# Allegro board HotwaterMachine_V1_0_10312009.brd
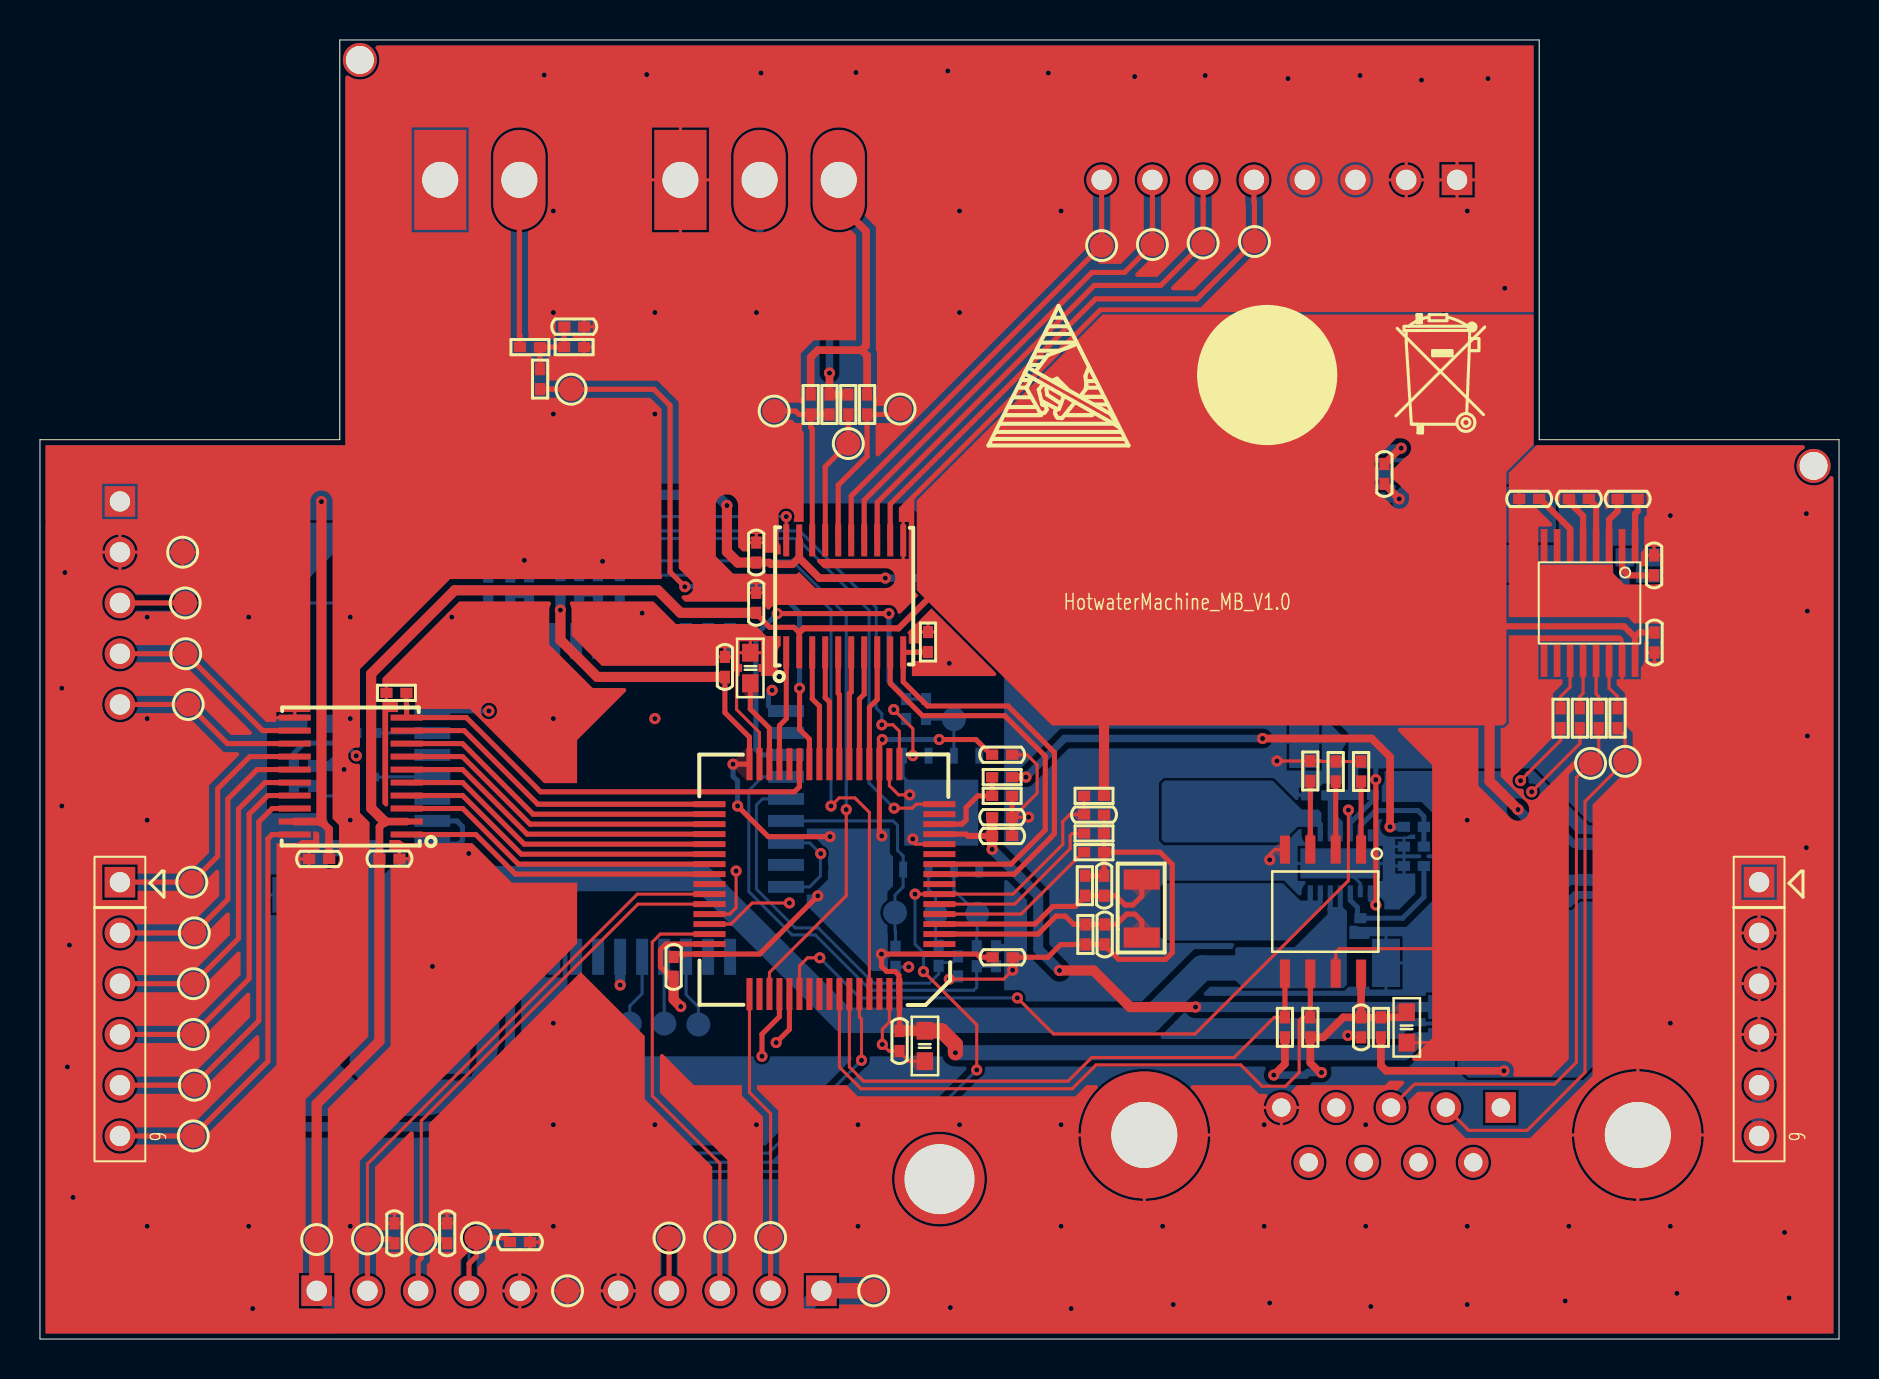
[diagram p0: board, top side]
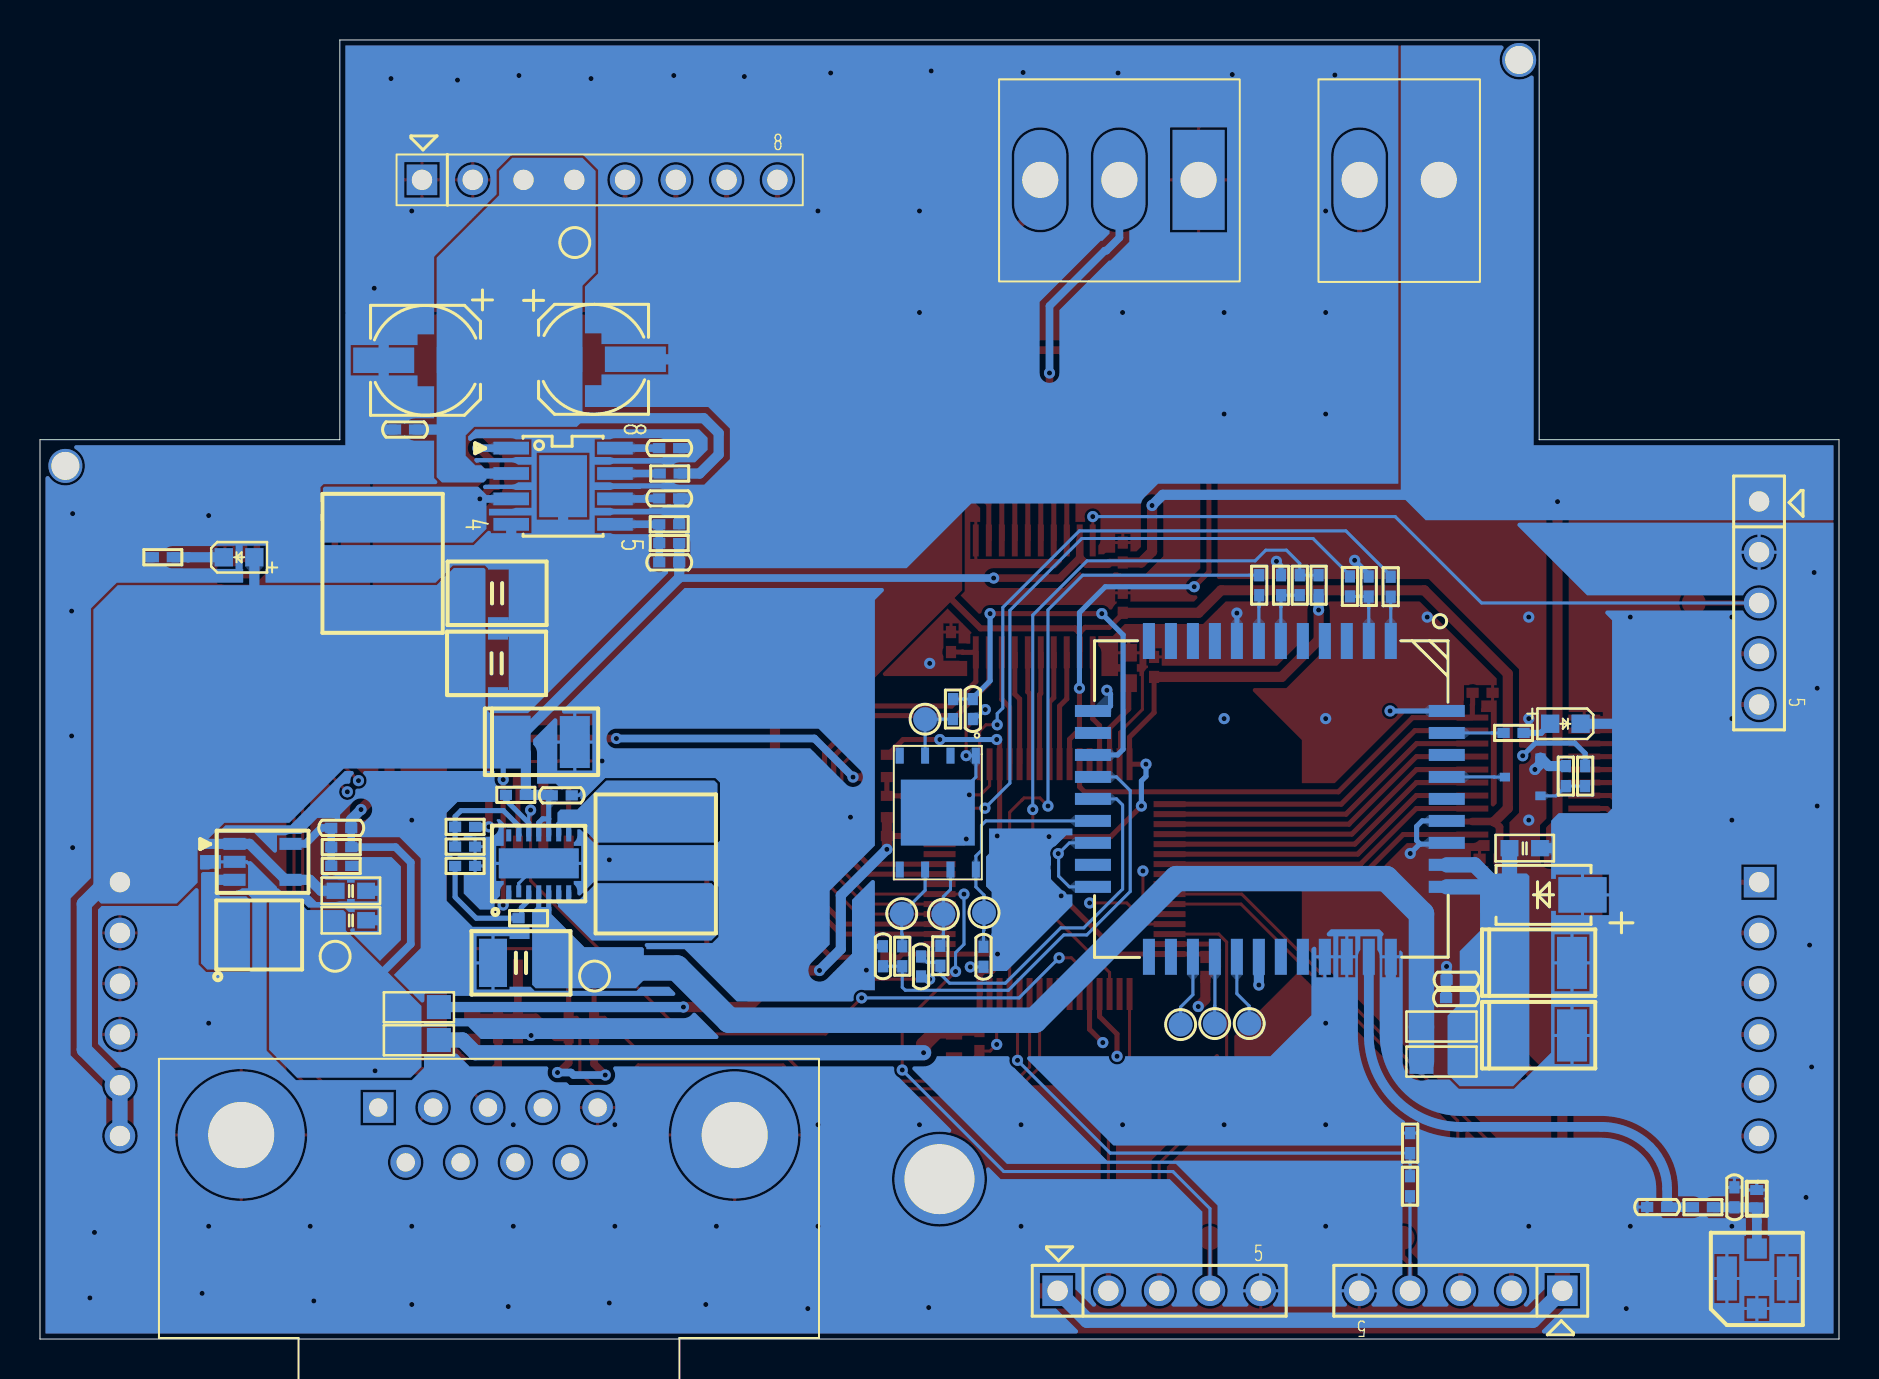
[diagram p1: board, bottom side, seen from below]

Outline 90 x 65 mm; copper layers: TOP, LAYER02, LAYER03, BOTTOM. Coordinates in mm from the lower left corner of the outline.
Outline path: 0,45 0,0 90,0 90,45 75,45 75,65 15,65 15,45 0,45

## Design rules (mm)
constraint set DEFAULT: min track width 0.152

## Placement (name value [footprint] x y rotation side)
C1  10uF/10V  [C0603]  15.72 24.56 180 bottom
C2  33pF/50V  [C0402]  19.16 17.06 0 bottom
C3  7pF/50V  [C0402]  19.13 17.98 0 bottom
C4  6TPE150MAZB NC  [TANB3528]  14.86 18.82 180 bottom
C5  6TPE150MAZB  [TANB3528]  14.86 15.19 180 bottom
C6  NC  [C0402]  9.1 6.6 0 bottom
C7  NC  [C0402]  5.23 7.09 90 bottom
C8  22pF/50V  [C0402]  45.92 18.64 270 bottom
C9  22pF/50V  [C0402]  47.83 19.15 90 bottom
C10  22pF/50V  [C0402]  43.33 31.52 270 bottom
C11  0.1uF/16V  [C0402]  42.8 19.13 270 bottom
C40  6TPE150MAZB  [TANB3528]  64.74 29.87 180 bottom
C41  10uF/10V  [C0603]  74.45 22.43 180 bottom
C42  0.1uF/16V  [C0402]  63.9 27.2 180 bottom
C43  0.1uF/16V NC  [C0402]  74.93 25.58 0 bottom
C44  10uF/10V  [C0603]  74.45 20.95 180 bottom
C45  100uF/6.3V  [C1210]  65.94 18.82 0 bottom
C46  0.1uF/50V  [C0402]  71.74 45.51 0 bottom
C47  10uF/35V  [C0505]  70.71 48.97 0 bottom
C48  10uF/35V  [C0505]  62.31 49.02 180 bottom
C49  0.1uF/16V  [C0402]  67.26 43.28 90 top
C50  0.1uF/16V  [C0402]  58.52 44.58 180 bottom
C51  22uF/10V  [C1210]  67.13 37.31 0 bottom
C52  22uF/10V  [C1210]  67.16 33.81 0 bottom
C53  0.47uF/16V  [C0402]  58.52 42.06 0 bottom
C54  22pF/16V NC  [C0402]  58.52 38.86 180 bottom
C60  0.1uF/16V  [C0402]  52.73 26.24 0 top
C61  4.7uF/10V  [C0603]  35.53 33.58 90 top
C62  7pF/50V  [C0402]  53.26 20.24 270 top
C63  7pF/50V  [C0402]  53.24 22.68 90 top
C64  0.1uF/16V  [C0402]  48.16 19.1 0 top
C65  0.1uF/16V  [C0402]  34.26 33.63 90 top
C66  0.1uF/16V  [C0402]  48.13 29.24 0 top
C67  0.1uF/16V  [C0402]  43 14.91 270 top
C68  0.1uF/16V  [C0402]  31.7 18.62 270 top
C69  4.7uF/10V  [C0603]  44.27 14.66 270 top
C70  0.1uF/16V  [C0402]  48.13 25.17 0 top
C71  1uF/16V  [C0402]  48.13 26.11 0 top
C72  22pF/50V  [C0402]  24.01 4.85 0 top
C73  22pF/50V  [C0402]  20.37 5.29 90 top
C74  22pF/50V  [C0402]  17.73 5.29 90 top
C75  10uF/10V  [C0603]  68.38 15.6 270 top
C76  0.1uF/16V  [C0402]  66.09 15.6 270 top
C77  0.1uF/16V  [C0402]  35.83 36.84 90 top
C78  0.1uF/16V  [C0402]  35.83 39.35 90 top
C79  0.1uF/16V  [C0402]  17.48 24.04 0 top
C80  0.1uF/16V  [C0402]  13.96 24.02 180 top
C81  0.1uF/16V  [C0402]  26.73 50.66 0 top
C82  0.1uF/16V  [C0402]  80.77 34.85 270 top
C83  0.1uF/16V  [C0402]  79.43 42.04 0 top
C84  0.1uF/16V  [C0402]  80.75 38.71 270 top
C85  0.1uF/16V  [C0402]  76.99 42.04 0 top
C86  0.1uF/16V  [C0402]  74.5 42.04 0 top
D1  -  [SMA4733A]  14.78 22.23 0 bottom
D2  CESD882UC5VB  [SOD882NP]  4.11 7.02 270 bottom
D3  GREEN  [LED0603]  13.69 30.78 180 bottom
D5  GREEN  [LED0603]  80.04 39.12 0 bottom
J1  MCJPS401  [IPEX]  4.11 3.03 0 bottom
J2  HEADER3  [JTAG_4-3]  36 58 0 bottom
J3  HEADER8  [JTAG-8]  62 58 180 bottom
J4  HEADER2  [JTAG_4-2]  22 58 0 bottom
J5  -  [JTAG-5]  4 35.56 270 bottom
J6  -  [JTAG-6]  86 16.51 270 top
J7  -  [JTAG-6]  4 16.51 270 top
L3  SWPA6028S4R7MT  [LSQR60]  59.18 23.77 180 bottom
L4  SWPA3010S1R5MT  [LSQR30]  79.02 20.22 90 bottom
L5  SWPA6028S4R7MT  [LSQR60]  72.87 38.81 0 bottom
NOREF  -  []  61.9 48.46 0 top
NOREF#2  -  [unnamed#2]  45 8 0 top
NOREF#3  -  [unnamed#3]  16 64 0 top
NOREF#4  -  []  72.59 48.41 0 top
NOREF#5  -  [unnamed#3]  88.73 43.69 0 top
NOREF#6  -  []  50.27 47.7 0 top
Q1  LMBT3904LT1G  [SOT23]  15.82 28.12 0 bottom
R1  000  [R0805]  19.89 15.62 180 bottom
R2  000  [R0805]  19.89 13.87 180 bottom
R3  000  [R0402]  6.81 6.6 180 bottom
R4  10K  [R0402]  13.67 28.17 90 bottom
R5  102  [R0402]  12.7 28.17 270 bottom
R6  102  [R0402]  16.28 30.33 0 bottom
R7  102 NC  [R0402]  26.04 37.72 270 bottom
R8  102  [R0402]  26.97 37.72 270 bottom
R9  562  [R0402]  27.91 37.72 270 bottom
R10  000  [R0402]  29.01 37.72 270 bottom
R11  000  [R0402]  22.43 37.64 270 bottom
R12  102  [R0402]  24.47 37.66 270 bottom
R13  562  [R0402]  23.53 37.65 270 bottom
R14  510  [R0402]  44.32 31.52 90 bottom
R15  510  [R0402]  46.86 19.15 270 bottom
R16  510  [R0402]  44.96 19.18 270 bottom
R41  105  [R0402]  66.19 27.23 0 bottom
R42  9102  [R0402]  74.93 24.61 180 bottom
R43  1504  [R0402]  65.56 21.06 180 bottom
R44  2002  [R0402]  74.93 23.67 0 bottom
R45  105 NC  [R0402]  68.73 25.63 180 bottom
R46  105  [R0402]  68.73 24.64 0 bottom
R47  2k  [R0402]  83.85 39.12 180 bottom
R48  2103  [R0402]  68.73 23.67 0 bottom
R53  10K  [R0402]  58.5 43.31 0 bottom
R54  124K  [R0402]  58.52 39.83 0 bottom
R55  22.1K  [R0402]  58.52 40.77 0 bottom
R67  4.7k/NC  [R0402]  52.73 27.18 0 top
R68  1504  [R0402]  48.13 28.12 0 top
R69  000  [R0805]  71.04 14.96 0 bottom
R70  105  [R0402]  52.73 24.36 180 top
R71  105 NC  [R0402]  52.3 20.24 90 top
R72  105 NC  [R0402]  52.27 22.68 270 top
R73  1504  [R0402]  48.13 27.18 180 top
R74  000  [R0805]  71.04 16.61 0 bottom
R75  105  [R0402]  52.73 25.3 180 top
R76  105  [R0402]  21.46 9.8 90 bottom
R77  105  [R0402]  21.46 7.65 90 bottom
R89  000  [R0402]  67.08 15.6 90 top
R111  472  [R0402]  62.28 15.6 270 top
R112  472  [R0402]  63.55 15.6 270 top
R113  105  [R0402]  66.09 28.4 270 top
R114  105  [R0402]  64.82 28.4 270 top
R115  105  [R0402]  63.55 28.42 270 top
R116  10K  [R0402]  44.42 34.87 270 top
R117  10K  [R0402]  17.83 32.33 0 top
R118  220K  [R0402]  39.5 46.76 270 top
R119  470K  [R0402]  38.56 46.76 270 top
R120  2.2K  [R0402]  40.44 46.76 90 top
R121  2.2K  [R0402]  41.38 46.76 90 top
R122  3.3K 1%  [R0402]  24.51 49.63 180 top
R123  5.1K  [R0402]  26.72 49.63 180 top
R124  220R  [R0402]  25.02 48.03 90 top
R125  0  [R0402]  77.04 31.06 270 top
R126  0  [R0402]  76.07 31.06 270 top
R127  0  [R0402]  77.98 31.06 270 top
R128  0  [R0402]  78.92 31.06 270 top
TP1  TP NC  [TP120]  44.81 21.26 270 bottom
TP2  TP NC  [TP120]  46.89 21.29 270 bottom
TP3  TP NC  [TP120]  45.72 31.01 270 bottom
TP4  TP NC  [TP120]  42.77 21.34 270 bottom
TP5  TP NC  [TP120]  32.94 15.73 180 bottom
TP6  TP NC  [TP120]  29.51 15.79 180 bottom
TP7  TP NC  [TP120]  31.23 15.79 180 bottom
TP12  TP NC  [TP120]  75.23 19.15 180 bottom
TP14  TP NC  [TP120]  62.26 18.16 180 bottom
TP16  TP NC  [TP120]  13.84 4.98 0 top
TP17  TP NC  [TP120]  21.83 5.07 0 top
TP18  TP NC  [TP120]  19.08 4.98 0 top
TP19  TP NC  [TP120]  16.38 5 0 top
TP20  TP NC  [TP120]  41.71 2.41 0 top
TP21  TP NC  [TP120]  36.55 5.08 0 top
TP22  TP NC  [TP120]  34.01 5.11 0 top
TP23  TP NC  [TP120]  31.47 5.05 0 top
TP24  TP NC  [TP120]  7.14 39.37 0 top
TP25  TP NC  [TP120]  26.39 2.41 0 top
TP26  T POINT R  [TP120]  60.76 54.91 0 top
TP27  T POINT R  [TP120]  58.19 54.84 0 top
TP28  T POINT R  [TP120]  55.65 54.76 0 top
TP29  T POINT R  [TP120]  53.11 54.71 0 top
TP30  T POINT R  [TP120]  43.03 46.53 0 top
TP31  T POINT R  [TP120]  40.44 44.81 0 top
TP32  T POINT R  [TP120]  36.73 46.43 0 top
TP33  T POINT R  [TP120]  7.26 36.83 0 top
TP34  T POINT R  [TP120]  7.29 34.29 0 top
TP35  T POINT R  [TP120]  7.42 31.75 0 top
TP36  T POINT R  [TP120]  7.59 22.86 0 top
TP37  T POINT R  [TP120]  7.72 20.32 0 top
TP38  T POINT R  [TP120]  7.67 17.78 0 top
TP39  T POINT R  [TP120]  7.67 15.24 0 top
TP40  T POINT R  [TP120]  7.72 12.7 0 top
TP41  T POINT R  [TP120]  7.67 10.16 0 top
TP42  T POINT R  [TP120]  63.25 54.86 180 bottom
TP43  T POINT R  [TP120]  26.57 47.52 0 top
TP71  TP NC  [TP120]  79.3 28.91 0 top
TP72  TP NC  [TP120]  77.57 28.8 0 top
U1  -  [SIM800C]  28.47 27.03 270 bottom
U2  -  [PNC8PAD]  45.09 26.34 270 bottom
U8  SY8088  [SOT23_5]  78.87 23.88 270 bottom
U9  RT6154AGQW  [WDFN14ALPAD]  65.05 23.8 90 bottom
U10  TPS54339DDA  [PDSO-G8]  63.83 42.67 270 bottom
U11  STM32F401RET6  [LQFP64]  39.24 23.01 90 top
U12  24C32  [SOP8]  64.19 21.39 270 top
U13  MAX3232E  [TSSOP16]  77.52 36.83 270 top
U14  TXB0108PWRG4  [TSSOP20_TXB]  40.26 37.16 0 top
U15  TXB0108PWRG4  [TSSOP20_TXB]  15.54 28.17 90 top
X3  -  [DB9]  73.08 11.58 0 bottom
XP1  -  [JTAG-5]  32.74 2.41 180 bottom
XP2  -  [JTAG-5]  20.19 2.41 0 bottom
Y2  SC32S 32.768KHZ20  [3215]  55.12 21.54 90 top

## Library data of the parts
C1 C41 C44 C61 C69 C75 = CAP NP: Tolerance: #TOL; User Part Number: HAMP
C2 C3 C6-C11 C42 C43 C46 C49 C50 C53 C54 C60 C62-C68 C70-C74 C76-C86 = CAP NP: Tolerance: ***; User Part Number: ***
C4 C5 C40 = CAP POL
C45 C51 C52 = CAP NP: User Part Number: HAMP; Tolerance: #TOL
C47 C48 = CAP NP
D1 = DIODE SCHOTTKY
D2 = DIODE DIAC
D3 D5 = LED
J1 = 734120114
J2 = HEADER3
J3 = HEADER8
J4 = HEADER2
J5 XP1 XP2 = JTAG-5
J6 J7 = JTAG-6
L3-L5 = L
Q1 = 2N3904
R1 R2 R69 R74 = R0603_0
R3-R16 R41-R48 R53-R55 R67 R68 R70-R73 R75-R77 R89 R111-R128 = R0603_0: Tolerance: ***; User Part Number: ***
TP1-TP4 TP12 TP14 TP16-TP25 TP71 TP72 = TP
TP5-TP7 = CON1
TP26-TP43 = T POINT R
U1 = SIM800C
U2 = PNC8PAD
U8 = RT8096AHGB
U9 = RT6154AGQW
U10 = TPS54339DDA
U11 = STM32F401RET6
U12 = AF24BC16
U13 = MAX3232E: Tolerance: ***; User Part Number: ***
U14 U15 = TXB0108PWRG4
X3 = DB9_0: User Part Number: ***
Y2 = CRYSTAL

## Footprints (pads in the part's own frame, mm; a bottom-side part is the same pattern mirrored in y, then rotated)
3215
  rect 1x1.8 smd: 1(-1.45,0) 2(1.45,0)
C0402
  rect 0.61x0.508 smd: 1(-0.5,0) 2(0.5,0)
C0505
  rect 3.048x1.27 smd: 1(-2.091,0) 2(2.091,0)
C0603
  rect 0.889x0.813 smd: 1(-0.762,0) 2(0.762,0)
C1210
  rect 1.397x2.413 smd: 1(-1.397,0) 2(1.397,0)
DB9
  rect 1.524x1.524 hole 0.914: 1(0,0)
  round 1.524 hole 0.914: 2(-2.743,0) 3(-5.486,0) 4(-8.23,0) 5(-10.973,0) 6(-1.372,2.743) 7(-4.115,2.743) 8(-6.858,2.743) 9(-9.601,2.743)
  round 6.35 hole 3.302: 10(6.858,1.372) 11(-17.831,1.372)
IPEX
  rect 1x1 smd: 1(0,-1.5) 3(0,1.5)
  rect 1x2.2 smd: 2(1.5,0) 4(-1.5,0)
JTAG-5
  rect 1.524x1.524 hole 1.016: 1(-6.35,0)
  round 1.524 hole 1.016: 2(-3.81,0) 3(-1.27,0) 4(1.27,0) 5(3.81,0)
JTAG-6
  rect 1.524x1.524 hole 1.016: 1(-6.35,0)
  round 1.524 hole 1.016: 2(-3.81,0) 3(-1.27,0) 4(1.27,0) 5(3.81,0) 6(6.35,0)
JTAG-8
  rect 1.524x1.524 hole 1.016: 1(-8.89,0)
  round 1.524 hole 1.016: 2(-6.35,0) 3(-3.81,0) 4(-1.27,0) 5(1.27,0) 6(3.81,0) 7(6.35,0) 8(8.89,0)
JTAG_4-2
  rect 2.6x5 hole 1.8: 1(-1.98,0)
  oval 2.6x5 hole 1.8: 2(1.98,0)
JTAG_4-3
  rect 2.6x5 hole 1.8: 1(-3.96,0)
  oval 2.6x5 hole 1.8: 2(0,0) 3(3.96,0)
LED0603
  rect 0.914x0.914 smd: 1(-0.762,0) 2(0.762,0)
LQFP64
  rect 0.3x1.6 smd: 1(-3.75,-5.75) 2(-3.25,-5.75) 3(-2.75,-5.75) 4(-2.25,-5.75) 5(-1.75,-5.75) 6(-1.25,-5.75) 7(-0.75,-5.75) 8(-0.25,-5.75) 9(0.25,-5.75) 10(0.75,-5.75) 11(1.25,-5.75) 12(1.75,-5.75) 13(2.25,-5.75) 14(2.75,-5.75) 15(3.25,-5.75) 16(3.75,-5.75) 33(3.75,5.75) 34(3.25,5.75) 35(2.75,5.75) 36(2.25,5.75) 37(1.75,5.75) 38(1.25,5.75) 39(0.75,5.75) 40(0.25,5.75) 41(-0.25,5.75) 42(-0.75,5.75) 43(-1.25,5.75) 44(-1.75,5.75) 45(-2.25,5.75) 46(-2.75,5.75) 47(-3.25,5.75) 48(-3.75,5.75)
  rect 1.6x0.3 smd: 17(5.75,-3.75) 18(5.75,-3.25) 19(5.75,-2.75) 20(5.75,-2.25) 21(5.75,-1.75) 22(5.75,-1.25) 23(5.75,-0.75) 24(5.75,-0.25) 25(5.75,0.25) 26(5.75,0.75) 27(5.75,1.25) 28(5.75,1.75) 29(5.75,2.25) 30(5.75,2.75) 31(5.75,3.25) 32(5.75,3.75) 49(-5.75,3.75) 50(-5.75,3.25) 51(-5.75,2.75) 52(-5.75,2.25) 53(-5.75,1.75) 54(-5.75,1.25) 55(-5.75,0.75) 56(-5.75,0.25) 57(-5.75,-0.25) 58(-5.75,-0.75) 59(-5.75,-1.25) 60(-5.75,-1.75) 61(-5.75,-2.25) 62(-5.75,-2.75) 63(-5.75,-3.25) 64(-5.75,-3.75)
LSQR30
  rect 3.2x1.5 smd: 1(0,1.25) 2(0,-1.25)
LSQR60
  rect 5.7x2.2 smd: 1(0,2.2) 2(0,-2.2)
PDSO-G8
  rect 0.635x1.778 smd: 1(-1.905,-2.594) 2(-0.635,-2.594) 3(0.635,-2.594) 4(1.905,-2.594) 5(1.905,2.594) 6(0.635,2.594) 7(-0.635,2.594) 8(-1.905,2.594)
  rect 3.099x2.388 smd: 9(0,0)
PNC8PAD
  rect 0.8x0.4 smd: 1(-2.85,1.905) 2(-2.85,0.635) 3(-2.85,-0.635) 4(-2.85,-1.905) 5(2.85,-1.905) 6(2.85,-0.635) 7(2.85,0.635) 8(2.85,1.905)
  rect 3.3x3.7 smd: 9(0,0)
R0402
  rect 0.61x0.508 smd: 1(-0.5,0) 2(0.5,0)
R0805
  rect 1.2x1.2 smd: 1(-1,0) 2(1,0)
SIM800C
  rect 1.8x0.6 smd: 1(-7.9,6.05) 2(-7.9,4.95) 3(-7.9,3.85) 4(-7.9,2.75) 5(-7.9,1.65) 6(-7.9,0.55) 7(-7.9,-0.55) 8(-7.9,-1.65) 9(-7.9,-2.75) 10(-7.9,-3.85) 11(-7.9,-4.95) 12(-7.9,-6.05) 22(7.9,-6.05) 23(7.9,-4.95) 24(7.9,-3.85) 25(7.9,-2.75) 26(7.9,-1.65) 27(7.9,-0.55) 28(7.9,0.55) 29(7.9,1.65) 30(7.9,2.75) 31(7.9,3.85) 32(7.9,4.95) 33(7.9,6.05)
  rect 0.6x1.8 smd: 13(-4.4,-8.85) 14(-3.3,-8.85) 15(-2.2,-8.85) 16(-1.1,-8.85) 17(0,-8.85) 18(1.1,-8.85) 19(2.2,-8.85) 20(3.3,-8.85) 21(4.4,-8.85) 34(4.4,8.85) 35(3.3,8.85) 36(2.2,8.85) 37(1.1,8.85) 38(0,8.85) 39(-1.1,8.85) 40(-2.2,8.85) 41(-3.3,8.85) 42(-4.4,8.85)
SMA4733A
  rect 2.413x1.778 smd: 1(-1.95,0) 2(1.95,0)
SOD882NP
  rect 0.5x0.65 smd: 1(-0.435,0) 2(0.435,0)
SOP8
  rect 1.4x0.5 smd: 1(-3.1,1.905) 2(-3.1,0.635) 3(-3.1,-0.635) 4(-3.1,-1.905) 5(3.1,-1.905) 6(3.1,-0.635) 7(3.1,0.635) 8(3.1,1.905)
SOT23
  rect 0.508x0.432 smd: 1(-0.889,0.94) 2(-0.889,-0.965) 3(0.889,0)
SOT23_5
  rect 0.6x1.1 smd: 1(-0.9,-1.4) 2(0,-1.4) 3(0.9,-1.4) 4(0.9,1.4) 5(-0.9,1.4)
TANB3528
  rect 1.5x2.6 smd: 1(-1.5,0) 2(1.5,0)
TP120
  round 1.2 smd: 1(0,0)
TSSOP16
  rect 1.651x0.33 smd: 1(-2.87,2.276) 2(-2.87,1.626) 3(-2.87,0.975) 4(-2.87,0.325) 5(-2.87,-0.325) 6(-2.87,-0.975) 7(-2.87,-1.626) 8(-2.87,-2.276) 9(2.87,-2.276) 10(2.87,-1.626) 11(2.87,-0.975) 12(2.87,-0.325) 13(2.87,0.325) 14(2.87,0.975) 15(2.87,1.626) 16(2.87,2.276)
TSSOP20_TXB
  rect 0.3x1.6 smd: 1(-2.925,-2.8) 2(-2.275,-2.8) 3(-1.625,-2.8) 4(-0.975,-2.8) 5(-0.325,-2.8) 6(0.325,-2.8) 7(0.975,-2.8) 8(1.625,-2.8) 9(2.275,-2.8) 10(2.925,-2.8) 11(2.925,2.8) 12(2.275,2.8) 13(1.625,2.8) 14(0.975,2.8) 15(0.325,2.8) 16(-0.325,2.8) 17(-0.975,2.8) 18(-1.625,2.8) 19(-2.275,2.8) 20(-2.925,2.8)
unnamed#2
  round 4.5 hole 3.5: (0,0)
unnamed#3
  round 1.7 hole 1.4: (0,0)
WDFN14ALPAD
  rect 0.6x0.25 smd: 1(-1.4,1.5) 2(-1.4,1) 3(-1.4,0.5) 4(-1.4,0) 5(-1.4,-0.5) 6(-1.4,-1) 7(-1.4,-1.5) 8(1.4,-1.5) 9(1.4,-1) 10(1.4,-0.5) 11(1.4,0) 12(1.4,0.5) 13(1.4,1) 14(1.4,1.5)
  rect 1.5x4 smd: 15(0,0)

## Nets
4V_EN: R41.2 U9.12 U11.54(PD2)
GND: C1.2 C2.2 C3.2 C4.2 C5.2 C6.2 C7.2 C8.2 C9.2 C10.2 C11.2 C40.2 C41.2 C42.2 C44.2 C45.2 C46.2 C47.2 C48.2 C50.2 C51.1 C52.1 C53.1 C60.2 C61.2 C62.2 C63.2 C64.2 C65.2 C66.2 C67.2 C68.2 C69.2 C70.2 C71.2 C72.2 C73.2 C74.2 C75.2 C76.2 C77.2 C78.2 C79.2 C80.2 C81.2 C82.2 C84.1 C86.1 D1.1 D2.1 D3.2(CATHODE) J1.2 J1.3 J1.4 J2.1 J3.1 J3.2 J5.2 J6.2 J6.3 J6.4 Q1.2(EMITTER) R4.2 R9.1 R13.1 R44.1 R46.1 R47.1 R48.1 R55.1 R70.1 R71.1 R72.1 R73.1 R75.1 R76.2 R113.1 R114.1 R115.1 R116.1 R117.1 R123.1 TP24.1 TP25.1 U1.8 U1.13 U1.19 U1.21 U1.27 U1.30 U1.31 U1.33 U1.36 U1.37 U2.1(VSS) U2.9 U8.2 U9.2 U9.15 U10.4 U10.9 U11.12 U11.18 U11.31 U11.47 U11.63 U12.4 U12.7(WP) U13.15 U14.11 U15.11 X3.5 X3.10 X3.11 XP1.5 XP2.5
VCC_3.3V: C43.1 C44.1 C77.1 C79.1 C82.1 L4.2 R42.2 R67.2 R69.2 R74.2 R89.1 TP12.1 TP16.1 TP20.1 U13.16(VCC) U14.2 U15.2 XP1.1 XP2.1
VCC_4V: C45.1 R1.1 R2.1 R43.2 TP14.1 U9.4 U9.5(VOUT2)
VCC_5V: C40.1 C41.1 C42.1 C51.2 C52.2 C54.2 C78.1 C80.1 D5.1 J4.1 J5.1 J6.1 J6.5 J6.6 L5.1 R41.1 R54.1 U8.1 U8.4(VIN) U9.1 U9.10 U9.11 U14.19(VCCB) U15.19(VCCB)
VCC_9V: C46.1 C47.1 C48.1 J3.3 J3.4 R53.1 TP42.1(TP) U10.2
VCC_BAT: R45.2 R68.2
VCC_EEPROM: C75.1 C76.1 R89.2 R111.2 R112.2 U12.8
VCC_GPRS: C1.1 C2.1 C3.1 C4.1 C5.1 D1.2(CATHODE) R1.2 R2.2 U1.34 U1.35
VCC_MCU: C64.1 C65.1 C66.1 C67.1 C68.1 C69.1 R7.2 R69.1 U11.1 U11.19 U11.32 U11.48 U11.64
VCC_MCU_A: C70.1 C71.1 R74.1 U11.13
/CS: J5.5 TP35.1(TP) U15.13
/CS_MCU: U11.34 U15.8
/WR: J5.4 TP34.1(TP) U15.12
/WR_MCU: U11.33 U15.9
BJ: J7.6 TP41.1(TP) U15.20
BJ_MCU: U11.40 U15.1
CCS: J3.6 TP27.1(TP) U14.13
CCS_MCU: U11.20 U14.8
CRS: J3.5 TP26.1(TP) U14.12
CRS_MCU: U11.10 U14.9
D0: J7.1 TP36.1(TP) U15.14
D0_MCU: U11.35 U15.7
D1: J7.2 TP37.1(TP) U15.15
D1_MCU: U11.36 U15.6
D2: J7.3 TP38.1(TP) U15.16
D2_MCU: U11.37 U15.5
D3: J7.4 TP39.1(TP) U15.17
D3_MCU: U11.38 U15.4
DATA: J5.3 TP33.1(TP) U14.20
DATA_MCU: U11.29 U14.1
EEPROM_SCL: R112.1 U11.58 U12.6
EEPROM_SDA: R111.1 U11.59 U12.5
GPRS_ANT_1: C6.1 R3.1 U1.32
GPRS_ANT_2: C7.1 D2.2 J1.1(SIG) R3.2
GPRS_DTR: R7.1 R8.1 U11.51
GPRS_PWKY: R5.1 U11.52
GPRS_RING: R10.1 U11.61
GPRS_RXD: R12.1 U11.16
GPRS_STAT: U1.42 U11.53
GPRS_TXD: R11.1 U11.17
H: J2.3 R119.1 R121.2
H_HEADER: R121.1 TP30.1(TP) U14.16
H_MCU: U11.23 U14.5
HEADER: R118.2 R119.2 TP32.1(TP) U14.18
HEADER_MCU: U11.25 U14.3
JR: J3.8 TP29.1(TP) U14.15
JR_MCU: U11.22 U14.6
JS: J3.7 TP28.1(TP) U14.14
JS_MCU: U11.21 U14.7
L: J2.2 R118.1 R120.2
L_HEADER: R120.1 TP31.1(TP) U14.17
L_MCU: U11.24 U14.4
OE1_TXB0108: R116.2 U11.9 U14.10
OE2_TXB0108: R117.2 U11.27 U15.10
OSC32_IN: C62.1 R71.2 U11.3 Y2.1
OSC32_OUT: C63.1 R72.2 U11.4 Y2.2
RS232_RX: R127.2 TP72.1 X3.3
RS232_TX: R128.2 TP71.1 X3.2
RT: R124.1 TP43.1(TP) U11.26
STM32_BOOT0: R76.1 R77.2 U11.60
STM32_RST#: C60.1 R67.1 TP23.1 U11.7 XP1.4
STM32_SWCLK: TP21.1 U11.49 XP1.2
STM32_SWDIO: TP22.1 U11.46 XP1.3
STM32_U1R: C73.1 TP18.1 U11.43 XP2.3
STM32_U1T: C74.1 TP19.1 U11.42 XP2.2
UART6_RXD: R125.2 U11.45
UART6_TXD: R126.2 U11.44
ZHTBZ: J7.5 TP40.1(TP) U15.18
ZHTBZ_MCU: U11.39 U15.3
N00661: R68.1 R73.2 U11.14
N01958: R70.2 U11.5
N01962: R75.2 U11.6
N02404: C61.1 U11.30
N04310: C43.2 R42.1 R44.2 U8.5
N04410: L4.1 U8.3
N05207: R45.1 R46.2 U9.13
N05247: L3.1 U9.8 U9.9
N05285: L3.2 U9.6 U9.7
N05385: R43.1 R48.2 U9.3
N07887: C11.1 TP4.1 U1.18 U2.8
N07915: R14.1 TP3.1 U2.3
N07927: R15.1 TP2.1 U2.6
N07939: R16.1 TP1.1 U2.7
N07951: R11.2 U1.1
N07973: R8.2 R9.2 U1.6
N08003: R10.2 U1.7
N08197: C10.1 R14.2 U1.15
N08201: C9.1 R15.2 U1.16
N08205: C8.1 R16.2 U1.17
N08417: R12.2 R13.2 U1.2
N08595: Q1.3 U1.39
N08947: D3.1 R6.1
N08951: R6.2 U1.41
N09147: Q1.1 R4.1 R5.2
N09205: TP5.1 U1.24
N09209: TP6.1 U1.26
N09235: TP7.1 U1.25
N14663: C72.1 R77.1 TP17.1 XP2.4
N19897: D5.2(CATHODE) R47.2
N164646: C50.1 U10.8
N165213: C49.2 U10.1
N165217: C49.1 L5.2 U10.3
N165276: C54.1 R54.2 R55.2 U10.5
N165400: C53.2 U10.6(VREG5)
N166481: R53.2 U10.7
N210476: R113.2 U12.1
N210572: R114.2 U12.2
N210630: R115.2 U12.3
N370640: C81.1 R122.1 R123.2 R124.2
N371044: J4.2 R122.2
N456055: R125.1 U13.12
N456063: R126.1 U13.11
N456131: R127.1 U13.13
N456159: R128.1 U13.14
N456311: C83.2 U13.1
N456331: C84.2 U13.2
N456335: C83.1 U13.3
N456347: C85.2 U13.4
N456351: C85.1 U13.5
N456379: C86.2 U13.6

Pads without a net: U1 3 4 5 9 10 11 12 14 20 22 23 28 29 38 40; U2 2 4 5; U9 14; U11 2 8 11 15 28 41 50 55 56 57 62; U13 7 8 9 10; X3 1 4 6 7 8 9

## Via types
v1: diameter 0.559, hole 0.254, TOP to BOTTOM, 153 vias

## Routing (per net, layer and track width the routed paths; a pad name or vN(x,y) marks a point on that pad's centre or on a via; arc(x,y) is an arc through that point)
4V_EN: length 40.5
  TOP w0.152: v1(39.01,19.08) 38.4,19.08 38,18.67 38,18.35 37.99,18.34 U11.54 ; v1(65.46,26.47) 65.46,22.94 57.78,15.27 50.7,15.27 v1(48.9,17.07)
  BOTTOM w0.152: v1(39.01,19.08) 41.02,17.07 v1(48.9,17.07) ; v1(65.46,26.47) 65.55,26.37 65.55,25.82
  BOTTOM w0.254: U9.12 65.55,25.82 66.69,26.97 R41.2
GND: length 362.4
  TOP w0.152: v1(61.52,23.98) 61.52,24.25 61.75,24.49 U12.4 ; 25.61,2.41 TP25.1 ; TP25.1 26.39,3.19 ; TP25.1 27.17,2.41 ; TP25.1 26.39,1.63 ; 13.46,23.59 C80.2 ; C80.2 13.46,24.45 ; C80.2 12.98,24.02 ; 17.98,23.6 C79.2 ; C79.2 18.47,24.04 ; C79.2 17.98,24.47 ; 3.06,39.37 J5.2 ; J5.2 4,40.31 ; J5.2 4,38.43 ; J5.2 4.94,39.37 ; C74.2 18.16,5.79 ; C74.2 17.3,5.79 ; C74.2 17.73,6.28 ; 48.68,26.11 v1(49.45,26.11) ; 48.68,26.11 49.89,27.31 49.89,28.73 49.38,29.24 C66.2 ; 48.68,26.11 C71.2 ; 32.04,55.32 J2.1 ; J2.1 30.56,58 ; J2.1 33.52,58 ; J2.1 32.04,60.68 ; J6.2 86,21.26 ; J6.2 86,19.38 ; J6.2 85.06,20.32 ; J6.2 86.94,20.32 ; 68.35,57.06 J3.2 ; J3.2 68.35,58.94 ; J3.2 67.41,58 ; J3.2 69.29,58 ; U11.18 42.49,27.68 42.95,27.23 v1(43.51,27.23) ; 80.34,34.35 C82.2 ; C82.2 81.2,34.35 ; C82.2 80.77,33.87 ; 79.15,34.96 U13.15 79.15,32.96 ; 43.18,40.94 U14.11 43.18,38.98 ; C61.2 36.12,34.34 ; C61.2 35.53,34.96 ; C61.2 34.95,34.34 ; 27.22,49.2 R123.1 ; R123.1 27.7,49.63 ; R123.1 27.22,50.06 ; X3.5 63.04,11.58 ; X3.5 62.1,10.64 ; X3.5 61.16,11.58 ; v1(42.71,31.5) 43.67,30.54 v1(43.67,29.19) ; C77.2 35.83,37.82 ; C77.2 35.4,37.34 ; C77.2 36.26,37.34 ; 7.14,38.59 TP24.1 ; TP24.1 7.92,39.37 ; TP24.1 6.36,39.37 ; TP24.1 7.14,40.15 ; 28.93,1.47 28.93,2.41 ; 28.93,2.41 27.99,2.41 ; 28.93,2.41 28.93,3.35 ; 28.93,2.41 29.87,2.41 ; C73.2 20.8,5.79 ; C73.2 19.94,5.79 ; C73.2 20.37,6.28 ; C78.2 35.83,40.34 ; C78.2 35.4,39.85 ; C78.2 36.26,39.85 ; v1(65.43,15.19) 65.52,15.1 C76.2 ; v1(43.66,25.02) 43.66,24.89 43.79,24.76 U11.12 ; v1(48.66,18.46) 48.21,18.01 v1(45.49,18.01) ; 43.99,35.37 R116.1 ; R116.1 44.42,35.86 ; R116.1 44.86,35.37 ; J3.1 71.83,58 ; J3.1 70.89,57.06 ; J3.1 69.95,58 ; J3.1 70.89,58.94 ; C72.2 24.99,4.85 ; C72.2 24.51,4.42 ; C72.2 24.51,5.28 ; XP2.5 24.94,2.41 ; XP2.5 23.06,2.41 ; XP2.5 24,1.47 ; XP2.5 24,3.35 ; 85.06,15.24 J6.4 ; J6.4 86,14.3 ; J6.4 86,16.18 ; J6.4 86.94,15.24 ; C65.2 34.26,34.61 ; C65.2 34.7,34.13 ; C65.2 33.83,34.13 ; 12.74,31.42 U15.11 11.77,31.09 ; 76.58,10.21 X3.10 ; X3.10 83.29,10.21 ; X3.10 79.93,6.86 ; X3.10 79.93,13.56 ; J6.3 86.94,17.78 ; J6.3 86,18.72 ; J6.3 86,16.84 ; J6.3 85.06,17.78 ; C81.2 27.23,51.09 ; C81.2 27.71,50.66 ; C81.2 27.23,50.22 ; 55.24,10.21 58.6,10.21 ; 55.24,10.21 51.89,10.21 ; 55.24,10.21 55.24,6.86 ; 74,41.6 C86.1 74,42.47 ; C60.2 R75.1 R70.1 ; v1(61.88,28.92) R115.1 64.08,28.92 64.11,28.9 R114.1 R113.1 ; 80.31,39.21 C84.1 ; C84.1 81.18,39.21 ; C84.1 80.75,39.69 ; 17.33,32.77 R117.1 17.33,31.9 ; 34.85,33.35 34.85,31.5 35.99,30.35 U11.31 ; C75.2 69.62,14.83 ; U11.63 42.49,15.85 42.14,15.5 v1(42.14,14.74) 42.47,14.41 C67.2 43,14.36 43.45,13.91 43.5,13.91 43.51,13.9 C69.2 ; U12.7 64.82,19.35 65,19.53 69.85,19.53
  TOP w0.254: R72.1 C63.2 53.24,24.35 R70.1 56.03,24.36 56.64,23.75 56.64,19.33 56.31,19 53.96,19 53.26,19.69 C62.2 R71.1 51.71,19.74 51.71,19.74 51.05,19.74 50.42,19.1 C64.2 v1(48.66,18.46) ; C68.2 31.55,18.12 31.04,18.63 31.04,19.48 31.32,19.76 U11.47 ; C70.2 C71.2 R73.1
  TOP w0.508: C68.2 31.7,16.99 v1(32.05,16.64)
  LAYER02 w0.152: 61.23,11.58 X3.5 ; X3.5 62.1,10.71 ; X3.5 62.1,12.46 ; X3.5 62.98,11.58 ; 28.93,2.41 28.93,3.35 ; 28.93,2.41 27.99,2.41 ; 28.93,2.41 29.87,2.41 ; 28.93,2.41 28.93,1.47 ; 85.06,15.24 J6.4 ; J6.4 86,14.3 ; J6.4 86.94,15.24 ; J6.4 86,16.18 ; J3.2 69.29,58 ; J3.2 67.41,58 ; J3.2 68.35,58.94 ; J3.2 68.35,57.06 ; 3.06,39.37 J5.2 ; J5.2 4,40.31 ; J5.2 4.94,39.37 ; J5.2 4,38.43 ; J3.1 70.89,58.94 ; J3.1 71.83,58 ; J3.1 70.89,57.06 ; J3.1 69.95,58 ; J6.3 86.94,17.78 ; J6.3 86,18.72 ; J6.3 85.06,17.78 ; J6.3 86,16.84 ; J2.1 32.04,60.68 ; J2.1 30.56,58 ; J2.1 33.52,58 ; J2.1 32.04,55.32 ; 85.06,20.32 J6.2 ; J6.2 86.94,20.32 ; J6.2 86,19.38 ; J6.2 86,21.26 ; XP2.5 24.94,2.41 ; XP2.5 24,3.35 ; XP2.5 24,1.47 ; XP2.5 23.06,2.41
  LAYER03 w0.152: 67.41,58 J3.2 ; J3.2 68.35,57.06 ; J3.2 69.29,58 ; J3.2 68.35,58.94 ; J6.2 86.94,20.32 ; J6.2 85.06,20.32 ; J6.2 86,21.26 ; J6.2 86,19.38 ; J2.1 32.04,60.68 ; J2.1 32.04,55.32 ; J2.1 30.56,58 ; J2.1 33.52,58 ; 86,16.84 J6.3 ; J6.3 86.94,17.78 ; J6.3 85.06,17.78 ; J6.3 86,18.72 ; 85.06,15.24 J6.4 ; J6.4 86.94,15.24 ; J6.4 86,14.3 ; J6.4 86,16.18 ; 24,1.47 XP2.5 ; XP2.5 24.94,2.41 ; XP2.5 24,3.35 ; XP2.5 23.06,2.41 ; J5.2 4.94,39.37 ; J5.2 4,38.43 ; J5.2 4,40.31 ; J5.2 3.06,39.37 ; 28.93,2.41 29.87,2.41 ; 28.93,2.41 27.99,2.41 ; 28.93,2.41 28.93,1.47 ; 28.93,2.41 28.93,3.35 ; 61.23,11.58 X3.5 ; X3.5 62.98,11.58 ; X3.5 62.1,12.46 ; X3.5 62.1,10.71 ; J3.1 70.89,58.94 ; J3.1 69.95,58 ; J3.1 71.83,58 ; J3.1 70.89,57.06
  BOTTOM w0.152: 67.34,17.44 C45.2 ; C45.2 67.34,20.21 ; C45.2 68.21,18.82 ; C42.2 63.04,27.2 62.81,27.43 ; J1.2 5.61,4.31 ; J1.2 6.29,3.03 ; J1.2 4.93,3.03 ; J1.2 5.61,1.75 ; v1(43.67,29.19) U2.1 43.18,28.12 43.51,27.79 v1(43.51,27.23) ; 63.24,28.39 C40.2 ; C40.2 62.32,29.87 ; C40.2 64.17,29.87 ; C40.2 63.24,31.35 ; 11.45,22.23 D1.1 ; D1.1 12.83,23.29 ; D1.1 12.83,21.16 ; C4.2 13.36,20.3 ; C4.2 14.29,18.82 ; C4.2 13.36,17.34 ; C4.2 12.43,18.82 ; 39.04,24.29 38.5,24.83 U1.19 ; 39.04,24.29 v1(39.06,24.29) ; 39.04,24.29 39.04,23.16 38.5,22.63 U1.21 ; 1.93,3.03 J1.4 ; J1.4 3.29,3.03 ; J1.4 2.61,4.31 ; J1.4 2.61,1.75 ; 81,23.88 U8.2 79.65,23.88 79.35,23.57 ; 12.43,15.19 C5.2 ; C5.2 14.29,15.19 ; C5.2 13.36,13.71 ; C5.2 13.36,16.67 ; 23.06,2.41 XP2.5 ; XP2.5 24,3.35 ; XP2.5 24.94,2.41 ; J5.2 4.94,39.37 ; J5.2 4,40.31 ; J5.2 3.06,39.37 ; J5.2 4,38.43 ; 62.87,23.8 U9.15 ; U9.15 66.05,22.8 U9.2 ; U9.15 67.23,23.8 ; J1.3 4.11,2.21 ; J1.3 4.79,1.53 ; J1.3 3.43,1.53 ; J1.3 4.11,0.85 ; 67.75,24.64 R46.1 ; R46.1 68.23,24.21 ; R46.1 68.23,25.07 ; 27.99,2.41 28.93,2.41 ; 28.93,2.41 29.87,2.41 ; 28.93,2.41 28.93,3.35 ; U1.31 24.62,20.2 ; U1.31 25.1,19.13 ; U1.31 24.15,19.13 ; U1.31 24.62,18.05 ; v1(45.49,18.01) 45.63,18.14 C8.2 ; 4.8,7.59 C7.2 ; C7.2 5.23,8.08 ; C7.2 5.66,7.59 ; 25.25,19.13 U1.30 ; U1.30 25.72,18.05 ; U1.30 26.2,19.13 ; C6.2 9.6,7.04 ; C6.2 10.08,6.6 ; C6.2 9.6,6.17 ; D2.1 4.62,7.46 ; D2.1 3.61,7.46 ; D2.1 4.11,7.88 ; 22.9,19.13 U1.33 21.95,19.13 ; 21.89,10.3 R76.2 21.02,10.3 ; 67.75,23.67 R48.1 ; R48.1 68.23,24.11 ; R48.1 68.23,23.24 ; v1(43.46,18.62) 42.81,18.62 C11.2 ; C10.2 43.2,31.02 42.72,31.5 v1(42.71,31.5)
  BOTTOM w0.254: U1.8 v1(30.12,36.32) ; v1(48.66,18.46) 48.66,19.41 48.41,19.65 C9.2 ; U1.36 19.69,24.76 20.95,24.76 ; 20.95,24.76 21.13,24.94 21.13,25.65 20.85,25.93 U1.37 ; 20.95,24.76 20.98,24.76 v1(21.45,24.3) ; R9.1 27.91,38.68 v1(28.14,38.91) ; v1(36.63,32.46) 36.44,32.28 36.44,31.68 36.7,31.43 U1.13 ; v1(24.23,38.96) 23.53,38.26 R13.1
  BOTTOM w0.508: U1.33 22.42,17.24 22.4,17.22 ; C2.2 19.66,17.95 C3.2 v1(19.63,18.64) ; R55.1 C53.1 57.28,42.06 ; v1(15.21,28.5) 14.94,28.78 Q1.2 14.52,28.67 R4.2 ; C1.2 13.89,24.56 ; 66.42,40.77 66.42,40.03 ; C46.2 72.84,45.51 ; C50.2 57.33,44.58 57.3,44.6 ; C41.2 72.8,22.43 72.77,22.45 ; C44.2 72.77,20.95 ; D3.2 11.07,30.78 ; C48.2 58.24,49.02 ; R44.1 73.79,23.67 ; C52.1 65.76,35.62 ; R47.1 85.27,39.12 ; U1.27 v1(29.02,17.71) ; 65.74,35.65 C51.1 ; 72.81,47.76 C47.2 72.81,50.13 ; U10.9 63.83,40.21
  vias: v1(1.09,32.56) v1(1.09,26.67) v1(1.24,38.35) v1(1.37,13.61) v1(1.47,19.71) v1(1.65,7.09) v1(5.36,36.12) v1(5.36,31.04) v1(5.36,25.96) v1(5.36,5.64) v1(10.44,36.12) v1(10.44,5.64) v1(10.64,1.52) v1(15.52,36.12) v1(15.52,31.04) v1(15.52,25.96) v1(15.52,5.64) v1(20.6,36.12) v1(25.22,63.25) v1(25.68,56.44) v1(25.68,51.36) v1(25.68,46.28) v1(25.68,31.04) v1(25.68,15.8) v1(25.68,10.72) v1(25.68,5.64) v1(30.35,63.27) v1(30.76,51.36) v1(30.76,46.28) v1(30.76,31.04) v1(30.76,10.72) v1(35.84,51.36) v1(35.84,10.72) v1(36.07,63.35) v1(40.82,63.37) v1(40.92,10.72) v1(40.92,5.64) v1(45.42,63.45) v1(45.49,33.81) v1(45.54,1.57) v1(46,56.44) v1(46,51.36) v1(46,10.72) v1(50.44,63.35) v1(51.08,56.44) v1(51.08,10.72) v1(51.08,5.64) v1(51.59,1.52) v1(54.76,63.17) v1(56.16,5.64) v1(56.69,1.73) v1(58.29,63.22) v1(61.24,10.72) v1(61.24,5.64) v1(61.52,1.8) v1(62.43,63.07) v1(66.04,63.22) v1(66.32,10.72) v1(66.32,5.64) v1(66.57,1.63) v1(69.11,62.99) v1(71.4,56.44) v1(71.4,25.96) v1(71.4,5.64) v1(71.4,1.73) v1(72.44,63.07) v1(73.28,52.58) v1(76.3,1.91) v1(76.48,5.64) v1(81.56,41.2) v1(81.56,15.8) v1(81.56,5.64) v1(81.89,2.29) v1(87.27,5.33) v1(87.5,2.06) v1(88.37,41.3) v1(88.42,36.42) v1(88.42,30.18) v1(88.37,24.59)
VCC_3.3V: length 132.5
  TOP w0.254: U14.2 37.98,35.35 37.72,35.61 36.51,35.61 35.83,36.29 C77.1
  TOP w0.305: C82.1 80,35.35 79.8,35.14 ; 37.98,35.35 37.99,35.35 38.2,35.56 42.95,35.56 44.53,37.13 44.55,37.13 ; 79.8,35.14 79.77,35.14 79.5,35.41 79.25,35.66 79.15,35.66 73.13,35.66 ; 79.8,35.14 U13.16
  TOP w0.381: v1(73.24,13.42) 67.35,13.42 67.08,13.69 R89.1 ; U15.2 17.26,25.89 16.98,25.62 C79.1
  TOP w0.508: R67.2 53.23,31.11 ; C79.1 16.98,14.9 13.84,11.76 TP16.1 ; 17.26,25.89 17.24,25.89 16.57,26.56 16.57,33.29 20.75,37.47 30.91,37.47 32.04,36.34 C77.1 ; 72.52,30.99 72.52,27.91 v1(73.94,26.49)
  TOP w0.762: XP2.1 TP16.1 ; XP1.1 TP20.1
  BOTTOM w0.381: C43.1 R42.2 72.21,24.61 71.45,23.85 71.45,19.76 72.92,18.29
  BOTTOM w0.508: v1(73.94,26.49) 74.43,26 C43.1
  BOTTOM w0.762: XP2.1 15.32,0.94 37.62,0.94 XP1.1
VCC_4V: length 53.5
  BOTTOM w0.254: U9.5 64.55,21.47 64.54,21.46 ; U9.4 65.05,21.49
  BOTTOM w1.27: R2.1 R1.1 20.89,21.27 22.66,23.04 33.15,23.04 40.23,15.95 55.52,15.95 58.14,18.57 60.38,18.57
VCC_5V: length 115
  TOP w0.254: v1(66.83,21.72) v1(66.83,27.99)
  TOP w0.381: 37.98,39.1 37.98,39.08 38.99,38.07 v1(42.29,38.07) ; 37.98,39.1 U14.19 ; 37.98,39.1 37.65,38.77 36.56,38.77 36.48,38.85 C78.1 ; U15.19 14.08,25.89 14.46,25.51 C80.1
  TOP w0.508: v1(34.37,41.71) 34.37,39.4 34.91,38.85 C78.1 ; 14.08,25.89 v1(14.08,41.9)
  BOTTOM w0.254: C42.1 64.55,27.05 64.55,26.03 ; v1(66.83,21.72) 66.55,21.99 U9.1 ; C40.1 66.83,29.29 v1(66.83,27.99) ; 64.55,26.03 64.85,26.03 65.05,25.83 U9.11 ; 64.55,26.03 U9.10
  BOTTOM w0.381: v1(42.29,38.07) 58,38.07 58.02,38.09
  BOTTOM w0.508: 82.49,24.78 U8.1 79.52,24.78 77.72,22.98 U8.4 76.49,22.98 75.95,22.43 C41.1 ; v1(34.37,41.71) 33.83,42.24 21.29,42.24 ; R54.1 C54.2 58.02,38.09 C40.1 65.69,29.32 R41.1 64.42,27.23 C42.1 ; D5.1 79.28,37.29
  BOTTOM w0.762: J6.1 86.69,22.86 87.78,21.77 87.78,14.48 J6.5 J6.6
VCC_9V: length 13.8
  BOTTOM w0.508: 66.42,43.31 67.97,43.31 ; 63.2,46.08 56.79,46.08 56.05,45.33 56.05,44.26 57,43.31 R53.1 ; C46.1 69.81,45.51
VCC_BAT: length 24.3
  TOP w0.381: v1(67.54,25.63) 67.54,29.13 66.62,30.05 v1(61.16,30.05) ; v1(49.33,28.12) R68.2
  BOTTOM w0.381: R45.2 v1(67.54,25.63) ; v1(61.16,30.05) 51.26,30.05 v1(49.33,28.12)
VCC_EEPROM: length 14.1
  TOP w0.381: v1(61.72,13.21) 62.28,13.77 R111.2 ; C76.1 R89.2 68.11,16.1 C75.1 ; C76.1 U12.8 ; C76.1 65.2,16.1 64.2,15.1 R112.2 63.55,13.82 64.03,13.34 v1(64.11,13.34)
  BOTTOM w0.381: v1(64.11,13.34) 63.44,13.34 63.31,13.21 v1(61.72,13.21)
VCC_GPRS: length 8.4
  BOTTOM w0.762: U1.34 17.13,22.63 ; 17.13,22.63 D1.2 16.48,22.47 C1.1 ; 17.13,22.63 18.23,23.73 U1.35
VCC_MCU: length 82.4
  TOP w0.254: C65.1 34.26,31.34 35.49,30.12 U11.32 v1(34.67,28.76) ; v1(42.14,30) 41.99,29.85 U11.19 41.99,25.29 v1(42.11,25.17) ; 42.97,17.94 42.97,18.2 42.78,18.39 42.36,18.39 42.1,18.65 v1(42.1,19.26) U11.1 46.86,19.26 47.02,19.1 C64.1 ; 42.97,17.94 42.99,17.92 U11.64 ; 42.97,17.94 42.97,17.28 U11.64 ; U11.64 42.99,16.13 43,16.12 C67.1 ; C68.1 31.84,19.26 U11.48 36,19.26 v1(38.91,22.17) ; C66.1 47.58,29.24 46.82,30 v1(44.98,30) ; v1(39.52,25.14) 36.43,25.14 v1(34.9,26.67)
  TOP w0.508: C69.1 43.02,15.42 C67.1 ; C65.1 27.88,33.13 26.04,34.98 v1(26.04,36.47)
  TOP w0.762: v1(45.8,14.33) 45.8,14.73 45.11,15.42 44.28,15.42 C69.1
  BOTTOM w0.254: v1(34.9,26.67) 34.9,27.92 34.67,28.15 v1(34.67,28.76) ; v1(42.14,30) v1(44.98,30)
  BOTTOM w0.508: R7.2 v1(26.04,36.47)
  BOTTOM w0.762: v1(45.8,14.33) 68.22,14.33 68.86,14.96 R69.1
VCC_MCU_A: length 31.5
  TOP w0.254: 46.43,25.17 46.34,25.26 U11.13
  TOP w0.305: 46.43,25.17 C70.1
  TOP w0.508: C71.1 C70.1 v1(47.63,24.5) ; v1(51,18.44) 52.7,18.44 54.53,16.61 v1(57.81,16.61)
  BOTTOM w0.508: v1(57.81,16.61) R74.1 ; v1(47.63,24.5) 49.94,22.2 49.94,19.51 v1(51,18.44)
/CS: length 9.6
  TOP w0.254: J5.5 TP35.1 9.37,29.79 9.58,29.79 U15.13
/CS_MCU: length 16.6
  TOP w0.254: U11.34 24.66,26.26 21.13,29.79 U15.8
/WR: length 10.3
  TOP w0.254: U15.12 11.14,30.44 TP34.1 J5.4
/WR_MCU: length 16.7
  TOP w0.254: U15.9 21.22,30.44 24.9,26.76 U11.33
BJ: length 21.5
  TOP w0.254: U15.20 11.61,25.24 11.4,25.03 11.4,13.89 TP41.1 J7.6
BJ_MCU: length 16
  TOP w0.254: U11.40 23.78,23.26 21.8,25.24 U15.1
CCS: length 26.7
  TOP w0.254: U14.13 41.88,41.86 52.74,52.72 56.07,52.72 TP27.1 58.19,56.91 58.19,56.91 J3.6
CCS_MCU: length 5.8
  TOP w0.254: U14.8 41.88,32 41.49,31.61 U11.20
CRS: length 28.6
  TOP w0.254: U14.12 42.53,41.77 52.81,52.04 57.89,52.04 TP26.1 60.76,56.88 60.73,56.91 J3.5
CRS_MCU: length 20.5
  TOP w0.254: U11.10 48.58,23.76 50.29,25.48 50.29,29.16 48.26,31.19 44.15,31.19 42.53,32.8 U14.9
D0: length 13.3
  TOP w0.254: J7.1 TP36.1 8.89,24.16 8.89,27.53 10.5,29.14 U15.14
D0_MCU: length 16.5
  TOP w0.254: U11.35 24.52,25.76 21.14,29.14 U15.7
D1: length 15.1
  TOP w0.254: J7.2 TP37.1 9.4,22 9.4,27.03 10.87,28.49 U15.15
D1_MCU: length 16.5
  TOP w0.254: U15.6 21.14,28.49 24.37,25.26 U11.36
D2: length 16.7
  TOP w0.254: U15.16 11.26,27.84 9.93,26.52 9.93,20.04 TP38.1 J7.3
D2_MCU: length 16.4
  TOP w0.254: U11.37 24.22,24.76 21.14,27.84 U15.5
D3: length 18.5
  TOP w0.254: U15.17 11.39,27.19 10.46,26.26 10.46,18.03 TP39.1 J7.4
D3_MCU: length 16.4
  TOP w0.254: U11.38 24.08,24.26 21.15,27.19 U15.4
DATA: length 39.6
  TOP w0.152: U14.20 v1(37.33,41.15)
  TOP w0.254: J5.3 TP33.1
  BOTTOM w0.152: J5.3 17.88,36.83 22.2,41.15 34.13,41.15 34.13,41.15 34.6,41.15 34.6,41.15 v1(37.33,41.15)
DATA_MCU: length 5.7
  TOP w0.254: U14.1 37.33,31.03 36.99,30.69 U11.29
EEPROM_SCL: length 33.7
  TOP w0.152: U11.58 39.99,13.6 41.07,12.52 51.64,12.52 52.83,13.72 60.07,13.72 61.14,12.65 62.31,12.65 62.99,13.33 62.99,15.94 63.14,16.1 R112.1
  TOP w0.254: R112.1 U12.6
EEPROM_SDA: length 29.7
  TOP w0.152: R111.1 61.75,16.1 59.74,14.08 52.62,14.08 51.44,12.9 41.2,12.9 40.49,13.61 U11.59 ; U12.5 62.28,18.74
  TOP w0.254: R111.1 U12.5
GPRS_ANT_1: length 25.4
  BOTTOM w0.483: U1.32 23.52,15.23 arc(22.17,11.97) 18.91,10.62 11.9,10.62 arc(10.58,10.36) 9.47,9.61 arc(8.82,8.65) 8.6,7.51 C6.1 8.59,6.6 R3.1
GPRS_ANT_2: length 4.3
  BOTTOM w0.483: J1.1 4.11,5.89 4.11,5.89 D2.2 5.23,6.59 C7.1 6.3,6.59 R3.2
GPRS_DTR: length 37.1
  TOP w0.152: U11.51 36.49,18.34 40.34,22.18 v1(40.34,26.49)
  BOTTOM w0.152: v1(40.34,26.49) 40.34,36.22 37.62,38.94 29.21,38.94 28.68,39.47 27.64,39.47 26.97,38.8 R8.1 R7.1
GPRS_PWKY: length 38.1
  TOP w0.254: v1(36.12,14.15) 36.12,15.26 36.99,16.13 U11.52
  LAYER02 w0.254: v1(15.82,29.18) 22.15,29.18 25.04,26.29 25.04,19.76 30.66,14.15 v1(36.12,14.15)
  BOTTOM w0.254: R5.1 12.7,29.3 13.22,29.82 15.19,29.82 v1(15.82,29.18)
GPRS_RING: length 32.6
  TOP w0.152: v1(39.57,26.67) 39.98,27.08 40.77,27.08 40.87,26.98 40.87,26.97 41.49,26.35 U11.61
  BOTTOM w0.152: v1(39.57,26.67) 39.57,36.48 37.83,38.22 R10.1
GPRS_RXD: length 32.1
  TOP w0.152: U11.16 43.83,26.76 43.63,26.56 v1(42.73,26.56)
  BOTTOM w0.152: R12.1 24.47,38.21 26.31,40.06 37.88,40.06 41.48,36.46 41.48,27.81 v1(42.73,26.56)
GPRS_STAT: length 32.1
  TOP w0.254: v1(36.83,14.83) 37.49,15.5 U11.53
  LAYER02 w0.254: v1(36.83,14.83) 30.84,14.83 28.07,17.6 28.07,26.72 23.36,31.43 v1(22.46,31.43)
  BOTTOM w0.254: U1.42 v1(22.46,31.43)
GPRS_TXD: length 30.6
  TOP w0.152: v1(42.11,30.73) 42.67,30.73 42.99,30.41 U11.17
  BOTTOM w0.152: v1(42.11,30.73) 42.11,31.29 41.83,31.57 41.83,36.6 38,40.44 24.67,40.44 22.43,38.19 R11.1
H: length 16.1
  TOP w0.381: R121.2 41.38,49.21 41.11,49.48 ; J2.3 39.96,56.8 41.33,55.43 41.33,49.7 41.11,49.48 ; 41.11,49.48 38.91,49.48 38.56,49.12 R119.1
H_HEADER: length 8.7
  TOP w0.254: TP30.1 42.76,46.26 R121.1 41.38,44.17 39.93,42.73 U14.16
H_MCU: length 5.6
  TOP w0.254: U11.23 39.99,32.24 39.93,32.3 U14.5
HEADER: length 9.2
  TOP w0.254: U14.18 38.63,45.55 38.56,45.63 R119.2 ; R119.2 R118.2 ; R119.2 37.97,46.26 37.8,46.43 TP32.1
HEADER_MCU: length 5.7
  TOP w0.254: U11.25 38.99,31.67 38.63,32.03 U14.3
JR: length 23.2
  TOP w0.254: J3.8 53.11,56.91 53.11,56.91 TP29.1 40.58,42.18 U14.15
JR_MCU: length 5.6
  TOP w0.254: U14.6 40.58,32.38 40.49,32.29 U11.22
JS: length 25
  TOP w0.254: J3.7 55.65,56.91 55.65,56.91 TP28.1 54.25,53.37 52.63,53.37 41.23,41.97 U14.14
JS_MCU: length 5.7
  TOP w0.254: U11.21 40.99,32.03 41.23,32.27 U14.7
L: length 13.2
  TOP w0.381: v1(39.5,48.34) R118.1 R120.2
  BOTTOM w0.381: J2.2 36,55.11 36.65,54.46 36.73,54.46 39.5,51.69 v1(39.5,48.34)
L_HEADER: length 6.8
  TOP w0.254: U14.17 39.28,43.65 TP31.1 R120.1
L_MCU: length 5.7
  TOP w0.254: U14.4 39.28,32.09 39.49,31.88 U11.24
OE1_TXB0108: length 22.4
  TOP w0.254: U11.9 48.74,23.26 50.57,25.1 50.57,25.11 50.75,25.29 50.75,29.35 48.42,31.67 44.4,31.67 43.18,32.89 U14.10 43.83,34.36 43.84,34.37 R116.2
OE2_TXB0108: length 23.7
  TOP w0.254: U11.27 37.99,27.63 37.74,27.38 25.04,27.38 21.33,31.09 U15.10 18.34,31.74 18.33,31.75 R117.2
OSC32_IN: length 11.9
  TOP w0.254: Y2.1 55.12,20.92 54.78,21.26 54.36,21.26 53.85,20.74 C62.1 R71.2 51.71,20.74 51.3,21.16 50.83,21.16 49.93,20.26 U11.3
OSC32_OUT: length 11.9
  TOP w0.254: Y2.2 55.12,22.16 54.68,21.72 54.29,21.72 53.82,22.18 C63.1 R72.2 52.27,22.13 51.79,21.64 50.66,21.64 49.78,20.76 U11.4
RS232_RX: length 27.4
  TOP w0.152: R127.2 77.98,29.21 TP72.1 76.86,28.09 76.86,13.84 75.77,12.75 68.76,12.75 X3.3
RS232_TX: length 26.9
  TOP w0.152: X3.2 71.48,10.44 74.4,10.44 77.29,13.34 77.29,26.9 TP71.1 79.3,30.18 R128.2
RT: length 30.3
  TOP w0.254: v1(38,32.56) 38,30.51 38.49,30.01 U11.26 ; v1(32.26,37.64) 31.52,38.38 31.52,46.71 30.71,47.52 TP43.1 25.64,47.52 25.63,47.53 R124.1
  BOTTOM w0.254: v1(32.26,37.64) 36.7,37.64 38,36.35 v1(38,32.56)
STM32_BOOT0: length 26.1
  TOP w0.152: v1(41.1,13.94) 41.1,16 40.99,16.11 U11.60
  BOTTOM w0.152: v1(41.1,13.94) 36.46,9.3 R76.1 ; 21.44,9.32 R76.1 ; R76.1 21.46,8.15 R77.2
STM32_RST#: length 46.8
  TOP w0.152: v1(43.78,22.26) U11.7 48.68,22.26 51.17,24.75 51.17,25.9 51.51,26.24 C60.1 R67.1 ; v1(44.2,18.39) 46.86,15.72 v1(46.86,13.46)
  TOP w0.254: XP1.4 TP23.1
  BOTTOM w0.152: v1(43.78,22.26) 43.78,19.75 44.2,19.33 v1(44.2,18.39) ; XP1.4 31.47,6.53 33.32,8.38 41.78,8.38 v1(46.86,13.46)
STM32_SWCLK: length 15.3
  TOP w0.152: U11.49 35.49,12.34 36.55,11.28 TP21.1
  TOP w0.254: XP1.2 TP21.1
STM32_SWDIO: length 21.9
  TOP w0.152: TP22.1 34.01,8.79 30.63,12.17 30.63,19.86 31.03,20.26 U11.46
  TOP w0.254: XP1.3 TP22.1
STM32_U1R: length 28.9
  TOP w0.152: TP18.1 19.08,10.92 29.92,21.76 U11.43
  TOP w0.254: XP2.3 18.92,3.9 19.08,4.05 TP18.1 20.18,4.98 C73.1
STM32_U1T: length 30.5
  TOP w0.152: TP19.1 16.38,8.76 29.88,22.26 U11.42
  TOP w0.254: C74.1 17.52,5 TP19.1 XP2.2
UART6_RXD: length 48.7
  TOP w0.152: v1(37.49,21.82) 35.63,21.82 34.57,20.76 U11.45 ; R125.2 77.04,29.79 v1(74.63,27.38)
  LAYER02 w0.152: v1(37.49,21.82) 37.49,22.86 37.69,23.06 44.09,23.06 48.05,27.03 70.56,27.03 70.76,27.23 70.91,27.38 v1(74.63,27.38)
UART6_TXD: length 47.9
  TOP w0.152: U11.44 34.5,21.26 34.82,21.58 v1(34.82,23.42) ; v1(74.07,27.94) 76.07,29.95 R126.2
  LAYER02 w0.152: v1(74.07,27.94) 70.97,27.94 70.41,27.38 48.2,27.38 47.9,27.38 43.94,23.42 v1(34.82,23.42)
ZHTBZ: length 20.3
  TOP w0.254: J7.5 TP40.1 10.95,15.93 10.95,25.88 11.61,26.54 U15.18
ZHTBZ_MCU: length 16.3
  TOP w0.254: U11.39 23.93,23.76 21.15,26.54 U15.3
N00661: length 4.5
  TOP w0.254: U11.14 46.12,25.76 46.33,25.97 46.33,26.59 46.91,27.18 R73.2 R68.1
N01958: length 8.5
  TOP w0.152: R70.2 52.18,24.36 49.08,21.26 U11.5
N01962: length 9.1
  TOP w0.152: U11.6 48.76,21.76 51.54,24.54 51.54,25.19 51.65,25.3 R75.2
N02404: length 4.5
  TOP w0.254: C61.1 35.53,31.52 36.49,30.56 U11.30
N04310: length 4.3
  BOTTOM w0.381: R44.2 R42.1 C43.2 75.92,25.58 76.72,24.78 U8.5
N04410: length 1.1
  BOTTOM w0.508: U8.3 81.35,22.98
N05207: length 5.6
  BOTTOM w0.254: R46.2 R45.1 69.23,26.14 68.94,26.44 66.81,26.44 66.04,25.67 66.04,25.21 U9.13
N05247: length 1.3
  BOTTOM w0.254: U9.9 64.05,25.76 63.98,25.83 ; U9.8 63.55,25.8
N05285: length 1.3
  BOTTOM w0.254: U9.7 63.55,21.82 ; 63.91,21.74 64.05,21.89 U9.6
N05385: length 6.7
  BOTTOM w0.254: R48.2 69.23,22.12 68.17,21.06 R43.1 65.91,21.2 65.91,21.59 65.55,21.95 U9.3
N07887: length 12
  BOTTOM w0.152: U1.18 42.68,25.93 42.9,25.7 42.9,24.45 43.18,24.17 U2.8 43.18,22.62 42.77,22.22 TP4.1 42.77,20.46 42.8,20.43 C11.1
N07915: length 3.2
  BOTTOM w0.152: R14.1 44.33,31.01 TP3.1 U2.3
N07927: length 4.3
  BOTTOM w0.152: R15.1 46.86,20.24 46.89,20.26 TP2.1 45.72,22.45 U2.6
N07939: length 4
  BOTTOM w0.152: R16.1 44.81,19.83 TP1.1 44.81,22.14 44.45,22.49 U2.7
N07951: length 2.2
  BOTTOM w0.152: U1.1 22.42,36.55 22.43,36.56 R11.2
N07973: length 3.2
  BOTTOM w0.152: R8.2 R9.2 27.91,36.63 27.92,36.63 U1.6
N08003: length 2.3
  BOTTOM w0.152: R10.2 29.01,36.63 29.02,36.62 U1.7
N08197: length 20.1
  TOP w0.254: v1(36.88,36.3) v1(42.47,36.3)
  BOTTOM w0.152: R14.2 C10.1
  BOTTOM w0.254: v1(36.88,36.3) 35.81,35.23 35.81,29.5 36.09,29.23 U1.15 ; v1(42.47,36.3) 42.47,32.94 43.33,32.07 C10.1
N08201: length 22.7
  BOTTOM w0.152: C9.1 R15.2 46.86,17.6 46.71,17.45 41.55,17.45 38.79,20.22 37.63,20.22 35.46,22.39 35.46,27.44 36.14,28.13 U1.16
N08205: length 18.6
  BOTTOM w0.152: U1.17 36.14,27.03 35.84,26.72 35.84,22.51 37.78,20.57 38.93,20.57 41.7,17.81 44.5,17.81 44.96,18.27 R16.2 45.12,18.84 45.62,18.84 C8.1
N08417: length 3.2
  BOTTOM w0.152: U1.2 23.52,36.56 23.53,36.57 R13.2 24.46,37.15 R12.2
N08595: length 2.9
  BOTTOM w0.152: U1.39 17.25,28.13 17.25,28.12 Q1.3
N08947: length 1.5
  BOTTOM w0.305: D3.1 14.91,30.33 R6.1
N08951: length 2.8
  BOTTOM w0.152: R6.2 17.37,30.33 17.37,30.33 U1.41
N09147: length 2.4
  BOTTOM w0.152: Q1.1 14.16,27.18 R4.1 R5.2
N09205: length 3.6
  BOTTOM w0.152: TP5.1 32.94,16.61 32.32,17.23 U1.24
N09209: length 3.6
  BOTTOM w0.152: TP6.1 29.51,16.66 30.12,17.28 U1.26
N09235: length 3.3
  BOTTOM w0.152: TP7.1 31.23,16.66 31.22,16.67 U1.25
N14663: length 9.3
  TOP w0.254: C72.1 23.3,5.07 TP17.1 21.83,4.14 21.46,3.77 XP2.4
  BOTTOM w0.152: R77.1 XP2.4
N19897: length 2.6
  BOTTOM w0.508: R47.2 82.59,39.12 82.59,39.12 D5.2
N164646: length 2.2
  BOTTOM w0.381: U10.8 C50.1
N165213: length 2.8
  TOP w0.381: C49.2 68.05,44.58 v1(68.1,44.58)
  BOTTOM w0.381: U10.1 v1(68.1,44.58)
N165217: length 2.6
  TOP w0.381: v1(68,42.04) 68,42.05 C49.1
  BOTTOM w0.381: U10.3 v1(68,42.04)
N165276: length 4.1
  BOTTOM w0.381: 61.24,40.77 R55.2 R54.2 C54.1
N165400: length 2.2
  BOTTOM w0.381: C53.2 59.72,42.06 59.75,42.04 U10.6
N166481: length 2.2
  BOTTOM w0.381: 61.24,43.31 R53.2
N210476: length 3.4
  TOP w0.254: U12.1 R113.2
N210572: length 3.4
  TOP w0.254: U12.2 R114.2
N210630: length 3.4
  TOP w0.254: U12.3 R115.2
N370640: length 3.3
  TOP w0.254: R124.2 25.02,49.62 R122.1 R123.2 26.22,50.65 C81.1
N371044: length 8.4
  TOP w0.254: R122.2 24.01,50.22 23.98,50.24 J4.2
N456055: length 2.5
  TOP w0.152: R125.1 77.04,32.15 77.2,32.31 U13.12
N456063: length 2.6
  TOP w0.152: R126.1 76.07,32.15 76.55,32.62 U13.11
N456131: length 2.5
  TOP w0.152: R127.1 77.98,32.15 77.85,32.28 U13.13
N456159: length 2.6
  TOP w0.152: R128.1 78.92,32.15 78.5,32.57 U13.14
N456311: length 2.4
  TOP w0.305: C83.2 79.93,41.43 79.8,41.3 U13.1
N456331: length 2.9
  TOP w0.305: U13.2 79.15,38.52 79.46,38.21 C84.2
N456335: length 2.5
  TOP w0.305: U13.3 78.5,41 78.93,41.43 C83.1
N456347: length 2.5
  TOP w0.305: C85.2 77.85,41.68 U13.4
N456351: length 2.6
  TOP w0.305: C85.1 76.49,41.88 76.79,41.58 76.8,41.58 77.2,41.19 U13.5
N456379: length 3
  TOP w0.305: U13.6 76.55,40.54 76.42,40.67 76.42,40.67 76.21,40.88 76.2,40.88 75.05,42.04 C86.2

## Copper pours and planes (outline as drawn; the poured copper is in the pictures)
GND on TOP (solid shape): 17.9,31.57 17.91,31.56 17.91,31.37 17.42,31.37 17.42,26.75 17.35,26.65 17.24,26.68 17.13,26.79 17.13,31.95 17.9,31.95
GND on TOP (solid shape): 47.8,33.35 47.83,33.24 47.73,33.17 43.62,33.17 43.62,33.93 44.01,33.93 44.02,33.94 44.81,33.94 44.81,34.17 44.81,34.18 44.86,34.37 44.81,34.57 44.81,34.58 44.81,35.81 44.04,35.81 44.04,34.81 43.66,34.81 43.65,34.79 43.46,34.79 43.46,35.29 43.45,35.29 43.4,35.32 43.41,35.37 44.59,36.56
GND on TOP (solid shape): 31.81,35.78 35.73,35.78 36.33,35.18 37.06,35.18 37.06,34.69 36.94,34.54 36.9,34.36 36.9,33.17 36.07,33.17 36.07,33.39 35.94,33.39 35.94,33.77 36.07,33.77 36.07,34.91 35,34.91 35,33.77 35.13,33.77 35.13,33.39 35,33.39 35,33.17 34.82,33.17 34.82,33.22 34.76,33.38 34.66,33.52 34.65,33.54 34.65,33.56 34.62,33.56 34.57,33.6 34.57,33.7 34.65,33.7 34.65,34.56 33.88,34.56 33.88,33.69 28.11,33.69 26.59,35.21 26.59,36.47 26.58,36.62 26.52,36.75 26.52,36.85 26.61,36.91 30.68,36.91
GND on TOP (solid shape): outline of 93 points within 17.13,27.81 29.33,36.91
GND on TOP (solid shape): 79.18,35.09 79.2,34.98 79.1,34.91 74.95,34.91 74.95,33.01 76.16,33.01 76.16,32.78 75.69,32.31 75.69,30.1 73.9,28.31 73.89,28.31 73.67,27.83 74.11,27.54 74.19,27.51 74.22,27.42 74.51,26.99 74.99,27.2 75,27.21 76.67,28.89 76.78,28.91 76.84,28.81 76.85,28.74 76.86,28.66 76.86,28.63 76.48,28.25 76.48,14 75.61,13.13 73.81,13.13 73.72,13.17 73.64,13.71 73.24,13.92 68.75,13.92 68.65,13.98 68.67,14.09 68.85,14.26 68.91,14.26 68.91,14.33 69.65,15.06 69.65,28.73 67.97,30.41 67.94,30.52 68.04,30.58 71.96,30.58 71.96,27.68 73.54,26.1 74.33,26.1 74.33,26.89 73.08,28.15 73.08,30.58 73.26,30.58 73.48,30.81 73.48,35.2 79.06,35.2
GND on TOP (solid shape): outline of 5155 points within 0.28,0.28 89.72,64.72
GND on BOTTOM (solid shape): 57.2,16.3 57.28,16.33 57.36,16.29 57.55,16.11 57.81,16.05 69.32,16.05 69.32,15.88 70.79,15.88 70.79,15.69 69.32,15.69 69.32,15.65 68.58,15.65 67.94,15.01 56.16,15.01 56.07,15.07 56.09,15.19
GND on BOTTOM (solid shape): 67.1,26.01 67.15,25.98 67.09,25.41 67.54,25.13 68.23,25.13 68.4,25.16 68.55,25.25 68.8,25.25 68.8,25.02 67.8,25.02 67.8,24.26 69.03,24.26 69.05,24.25 69.11,24.16 69.05,24.06 69.03,24.05 67.8,24.05 67.8,23.29 68.8,23.29 68.8,22.29 67.99,21.49 67.35,21.49 67.27,21.53 67.25,21.61 67.24,21.83 67.13,22.02 66.98,22.17 66.98,22.4 66.93,22.6 66.8,22.75 66.8,22.92 67.18,22.92 67.18,24.68 66.8,24.68 66.8,25.63 66.73,25.63 66.69,25.66 66.7,25.71 66.99,26.01
GND on BOTTOM (solid shape): 45.14,14.11 45.39,13.77 45.8,13.64 46.26,13.64 46.35,13.58 46.33,13.47 41.63,8.76 33.17,8.76 31.09,6.69 31.09,3.22 30.6,2.57 30.83,1.8 30.85,1.69 30.75,1.63 29.65,1.63 29.55,1.69 29.57,1.8 28.93,3.3 28.29,1.8 28.31,1.69 28.21,1.63 24.72,1.63 24.63,1.69 24.65,1.8 24,3.3 23.36,1.8 23.38,1.69 23.29,1.63 22.18,1.63 22.09,1.69 22.11,1.8 22.34,2.57 21.84,3.22 21.84,8.58 21.84,8.58 21.84,8.92 36.61,8.92 41.27,13.57 41.27,13.58 41.46,13.76 41.5,14.03 41.52,14.11 41.6,14.15 45.13,14.15
GND on BOTTOM (solid shape): outline of 246 points within 47.78,16.89 65.33,37.58
GND on BOTTOM (solid shape): outline of 94 points within 58.23,16.85 80.94,28.42
GND on BOTTOM (solid shape): outline of 1238 points within 0.28,0.28 40.62,40.84
GND on BOTTOM (solid shape): outline of 2745 points within 22.05,0.28 89.72,64.72
GND on LAYER02 (solid shape): outline of 5997 points within 0.28,0.28 89.72,64.72
GND on LAYER03 (solid shape): outline of 6134 points within 0.28,0.28 89.72,64.72
GND on BOTTOM: 66.57,38.76 66.57,35.97 66.45,35.84 64.82,35.84 64.74,35.92 64.74,38.63 64.9,38.79 66.55,38.79
VCC_3.3V on TOP (solid shape): outline of 97 points within 43.87,30.71 74.72,51.26
VCC_3.3V on BOTTOM (solid shape): 78.54,21.82 78.54,14.48 77.14,13.08 71.45,13.08 70.92,13.61 70.92,16.66 74.7,20.45 74.7,21.34 74.83,21.46 76.63,21.46 77.06,21.89 78.46,21.89
VCC_4V on BOTTOM (solid shape): 65.38,21.41 65.38,17.73 65.2,17.55 60.2,17.55 59.79,17.96 59.79,19.53 59.87,19.61 62.76,19.61 64.41,21.26 64.41,21.62 65.18,21.62
VCC_5V on BOTTOM (solid shape): 70.15,37.72 86.11,37.72 87.33,36.5 87.33,22.17 86.94,21.79 83.16,21.79 82.12,22.83 82.12,24.49 80.77,25.83 77.52,25.83 74.8,28.55 65.51,28.55 65.46,28.6 65.46,31.17 65.48,31.19 67.36,31.19 67.72,31.55 67.72,38.51 67.79,38.58 69.29,38.58
VCC_5V on BOTTOM (solid shape): 21.92,42.21 20.68,40.97 0.28,40.97 0.28,44.72 15.28,44.72 15.28,63.12 15.33,63.21 15.44,63.2 16.69,63.31 16.8,64.56 16.8,64.67 16.89,64.72 21.92,64.72
VCC_9V on BOTTOM (solid shape): 67.03,58.45 67.03,57.23 70.15,54.1 70.15,43.13 69.89,42.86 67.81,42.86 67.67,43 67.67,43.46 67.92,43.71 68.22,43.71 68.71,44.2 68.71,45.21 68.28,45.64 63.14,45.64 62.87,45.92 62.87,52.7 62.2,53.37 62.2,58.45 62.87,59.11 66.37,59.11
VCC_GPRS on BOTTOM (solid shape): 17.96,23.14 17.96,20.42 18.97,19.41 18.97,16.79 19.58,16.18 19.58,13.26 18.97,12.65 16.31,12.65 15.49,13.46 15.49,23.16 15.62,23.29 17.81,23.29
VCC_MCU on BOTTOM (solid shape): 42.52,24.29 42.67,24.14 42.67,22.65 42.39,22.37 42.39,21.96 42.05,21.34 42.39,20.72 42.39,20.3 42.42,20.27 42.42,19.19 42.49,19.19 42.49,19.06 42.42,19.06 42.42,18.42 41.63,18.42 38.53,21.51 38.35,21.69 38.35,22.24 38.66,22.24 38.81,22.39 39.42,23 39.42,23.45 39.42,23.46 39.45,23.6 39.42,23.73 39.42,23.74 39.42,24.1 39.43,24.11 39.44,24.44 39.21,24.67 39.2,24.67 38.66,25.21 38.35,25.21 38.35,25.54 42.52,25.54
N04410 on BOTTOM (solid shape): 81.94,23.29 81.94,18.8 81.64,18.49 79.58,18.49 79.5,18.57 79.5,21.97 79.68,22.15 80.98,22.15 81.08,22.25 81.08,23.29 81.15,23.37 81.86,23.37
N05247 on BOTTOM (solid shape): 63.12,26.49 63.96,26.49 64.11,26.34 64.11,25.76 63.98,25.63 62.92,25.63 62.13,24.84 56.26,24.84 56.11,24.99 56.11,27.79 56.26,27.94 61.67,27.94
N05285 on BOTTOM (solid shape): 63.04,21.95 64.01,21.95 64.08,21.87 64.08,21.64 62.38,19.94 56.41,19.94 56.18,20.17 56.18,22.58 56.41,22.81 62.18,22.81
N165217 on BOTTOM (solid shape): 75.84,42.57 75.84,39.93 75.77,39.85 68.35,39.85 67.67,40.54 67.67,42.24 68.07,42.65 75.77,42.65

Small or netless copper shapes (teardrops, artwork), in the pictures only: 164 on BOTTOM, 261 on TOP, 6 on LAYER02

## Text on the board
Ref Des/Silkscreen Top: HotwaterMachine_MB_V1.0
XSECTION_CHART: *  SURFACE - AIR 0 MIL | L1: TOP CONDUCTOR - COPPER 1.6 MIL | *  DIELECTRIC - FR-4 4 MIL | L2: LAYER02 CONDUCTOR - COPPER 1.2 MIL | *  DIELECTRIC - FR-4 47 MIL | L3: LAYER03 CONDUCTOR - COPPER 1.2 MIL | L4: BOTTOM CONDUCTOR - COPPER 1.6 MIL | DESIGN CROSS SECTION CHART | ___________________________ | TOTAL THICKNESS 60.6 MIL | 1-4 | FIGURE | SIZE | 10.0 | 36.0 | 40.0 | 55.12 | 70.87 | 130.0 | 137.8 | DRILL CHART: TOP to BOTTOM | ALL UNITS ARE IN MILS | PLATED | QTY | 153 | 9 | 35 | 2 | 5 | 1
